# EAGLE board HF (EAGLE 6.5.0)
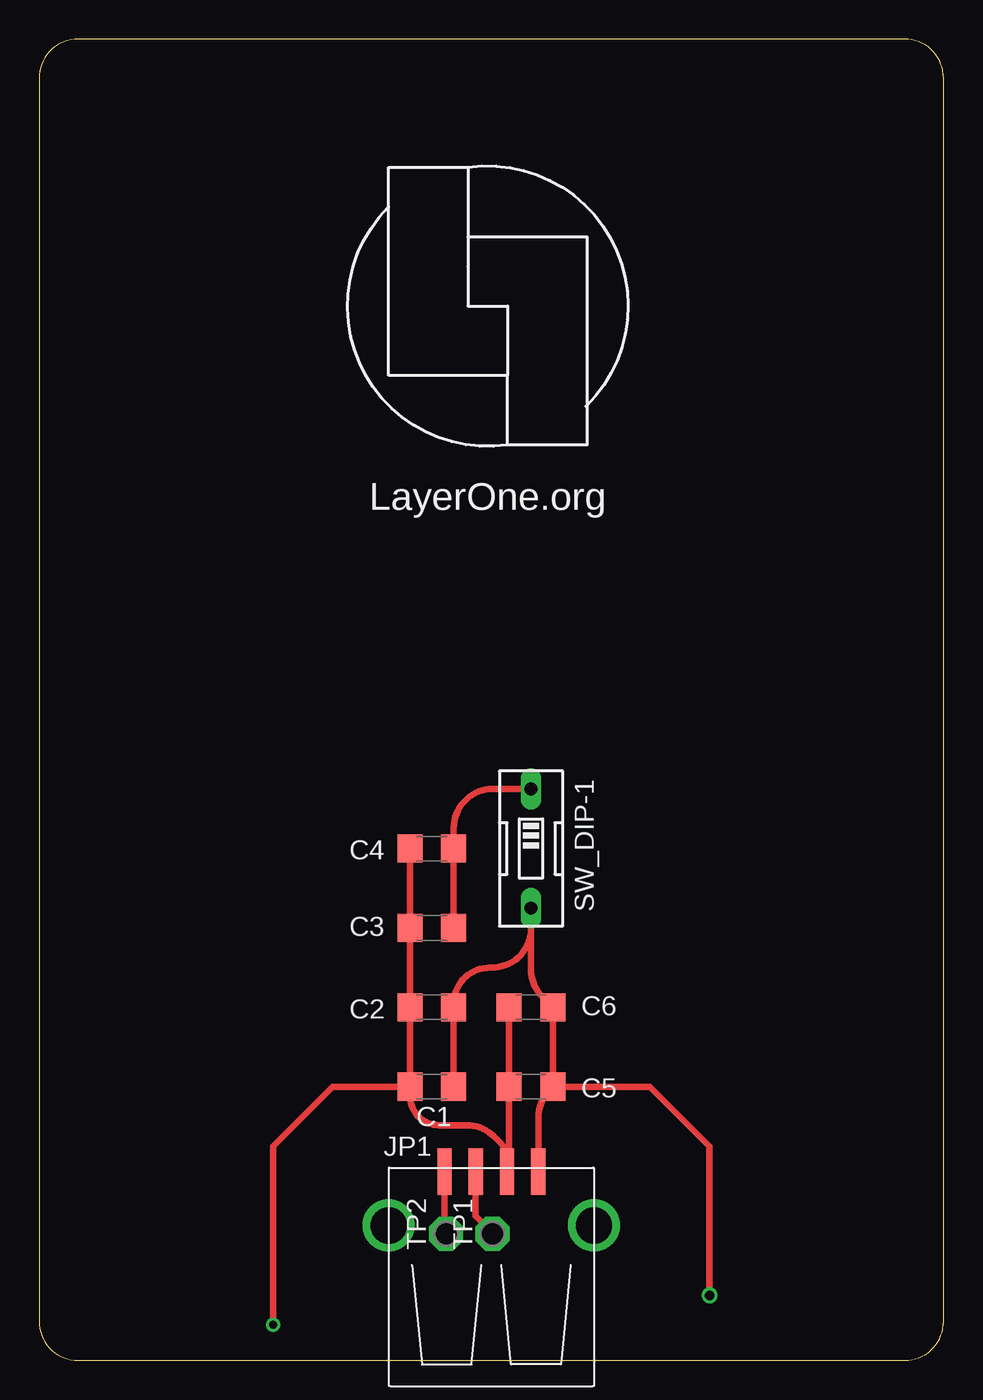
[diagram p0: board, top side]
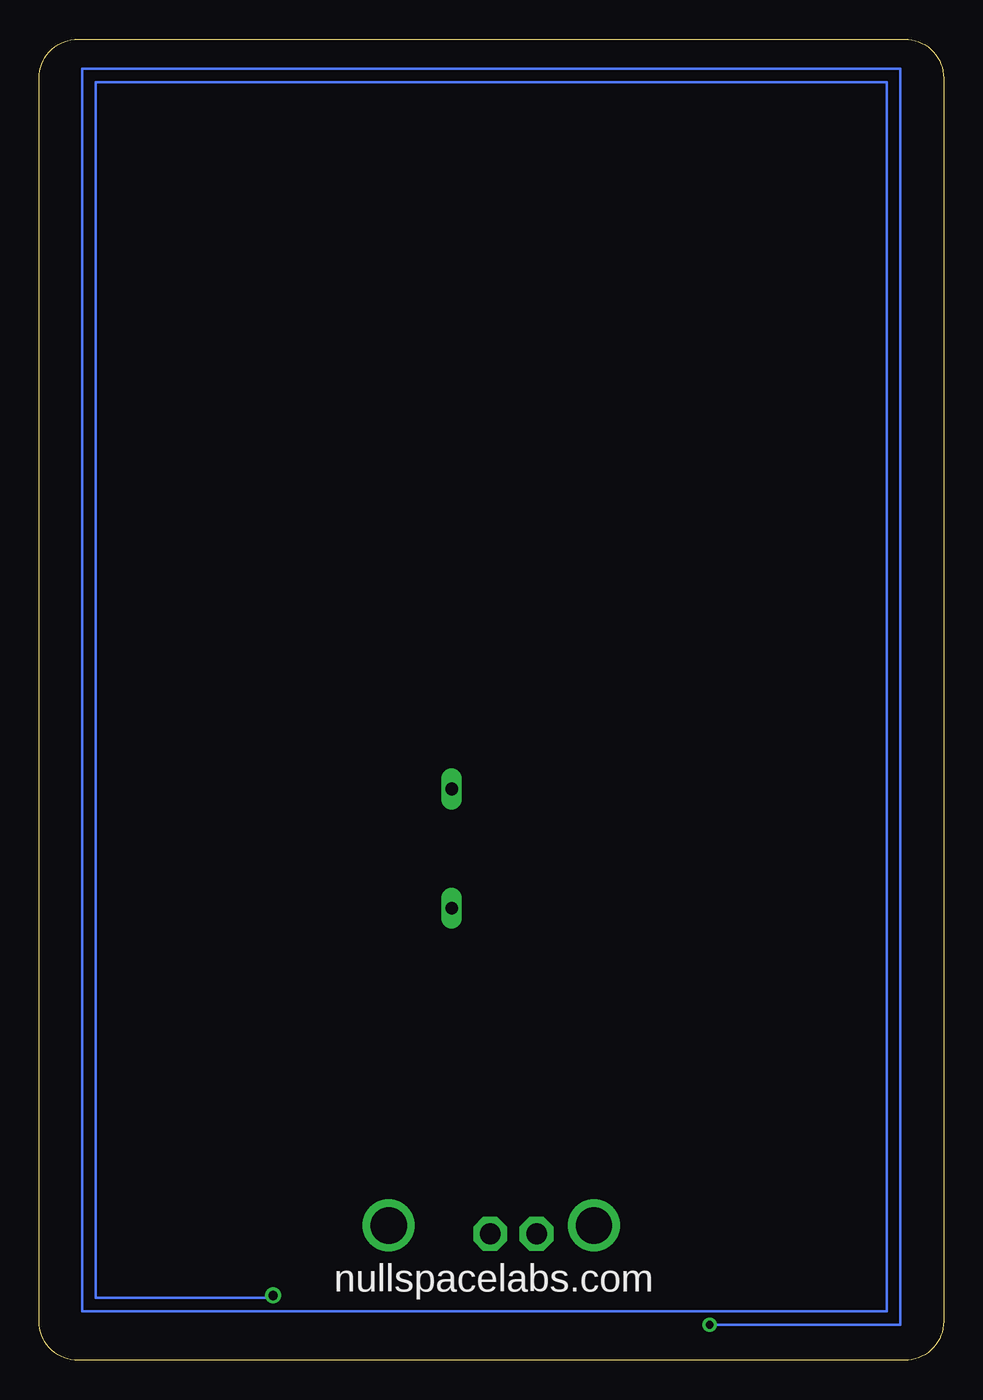
[diagram p1: board, bottom side, seen from below]

Size 57.91 x 84.58 mm. Coordinates in mm from the lower left corner, seen from the top.
Outline: 2.5,0 55.41,0 arc90 57.91,2.5 57.91,82.08 arc90 55.41,84.58 2.5,84.58 arc90 0,82.08 0,2.5 arc90 2.5,0
Copper layers (1*16): Top 0.035mm / dielectric 1.5mm / Bottom 0.035mm
Design rules "default": minimum track width 10mil, minimum drill 24mil, track to track 8mil, track to pad 8mil, pad to pad 8mil, via to via 8mil, smd to smd 8mil, copper to edge 40mil, drill to drill 8mil, minimum pad ring 10mil, minimum via ring 8mil, stop-mask expansion 4mil, vias tented up to drill 0mil, thermal gap 10mil

## Footprints (pad centres in the part's own frame; a part is rotated, then mirrored left to right if it is on the bottom)
C1206 = smd 1.6 x 1.8: 1 -1.4,0; 2 1.4,0
USB-A-S = smd 3 x 0.9: D+ 3.45,-1; D- 3.45,1; GND 3.45,-3; VBUS 3.45,3 | drill 2.311: P$5 0,-6.566; P$6 0,6.566
P1-13 = drill 1.321 pad 2.159 octagon: TP 0,0
DIPSWITCH-01 = drill 0.813 long: 1 0,-3.81; 4 0,3.81

## Placement (x,y rotation side)
C1  [C1206]  25.15,17.53 180 top
C2  [C1206]  25.15,22.61 180 top
C3  [C1206]  25.15,27.69 180 top
C4  [C1206]  25.15,32.77 180 top
C5  DNP  [C1206]  31.5,17.53 0 top
C6  DNP  [C1206]  31.5,22.61 0 top
JP1  USB-A-S  [USB-A-S]  28.96,8.64 90 top
TP1  TPPAD1-13  [P1-13]  29.03,8.1 90 top
TP2  TPPAD1-13  [P1-13]  26.06,8.1 90 top
U$1  SW_DIP-1  [DIPSWITCH-01]  31.5,32.77 180 top
U$2  [LARGE_L1_LOGO]  28.73,67.49 0 top

## Library data of the parts
C1-C6 = rcl
JP1 = SparkFun-Connectors
TP1 TP2 = testpad
U$1 = SparkFun-Electromechanical
U$2 = lf-antenna-usb

## Nets
ANT: C1.2 C2.2 C3.2 C4.2 C5.1 C6.1 JP1.D+
N$1: C1.1 C2.1 C5.2 C6.2 JP1.GND U$1.4
N$2: C3.1 C4.1 U$1.1
N$3: JP1.D- TP1.TP
N$4: JP1.VBUS TP2.TP

## Tracks (layer width: path | path; a pad name or v marks a point on that pad's centre or on a via)
ANT  (via drill 0.5)
  Top 0.406: C1.2 18.8,17.53 14.99,13.72 v14.99,2.29 | C1.2 C2.2 C3.2 C4.2 | JP1.D+ arc90 30.1,12.23 C5.1 | C5.1 arc-90 C5.1 | C5.1 30.1,13.36 29.13,14.33 arc45 27.36,15.06 25.6,15.06 arc-90 23.75,16.92 C1.2 | C5.1 arc-90 C5.1 | C5.1 C6.1
  Bottom 0.152: v14.99,2.29 2.77,2.29 2.77,82.68 55.14,82.68 55.14,3.15 3.63,3.15 3.63,81.81 54.28,81.81 54.28,4.01 43.51,4.01 42.95,4.01
N$1  (via drill 0.6)
  Top 0.406: C5.2 39.12,17.53 42.93,13.72 v42.93,4.17 | C1.1 C2.1 26.55,22.81 arc-90 28.88,25.15 29,25.15 arc90 31.5,27.65 U$1.4 31.5,25.04 arc45 32.23,23.27 C6.2 C5.2 | JP1.GND arc90 31.98,12.11 31.98,14.02 31.98,15.57 arc-45 32.71,17.34 C5.2
N$2
  Top 0.406: C3.1 C4.1 26.55,34.08 arc-90 29.05,36.58 U$1.1
N$3
  Top 0.406: JP1.D- 27.96,9.25 TP1.TP
N$4
  Top 0.406: JP1.VBUS 25.96,8.15 TP2.TP

## Text on the board
tPlace: LayerOne.org
bPlace: nullspacelabs.com